# Altium PCB RHD2132_64CH.PcbDoc
Units mil, origin at the board's own origin, x right, y up, seen from the top; angles counter-clockwise.
Board outline 1050 x 1350 mil, 6 copper layers (Top Layer, Ground Plane 1, Third Layer, Fourth Layer, Ground Plane 2, Bottom Layer), stack 58.425 mil thick; 14 components, 79 nets, 236 pads, 256 vias.
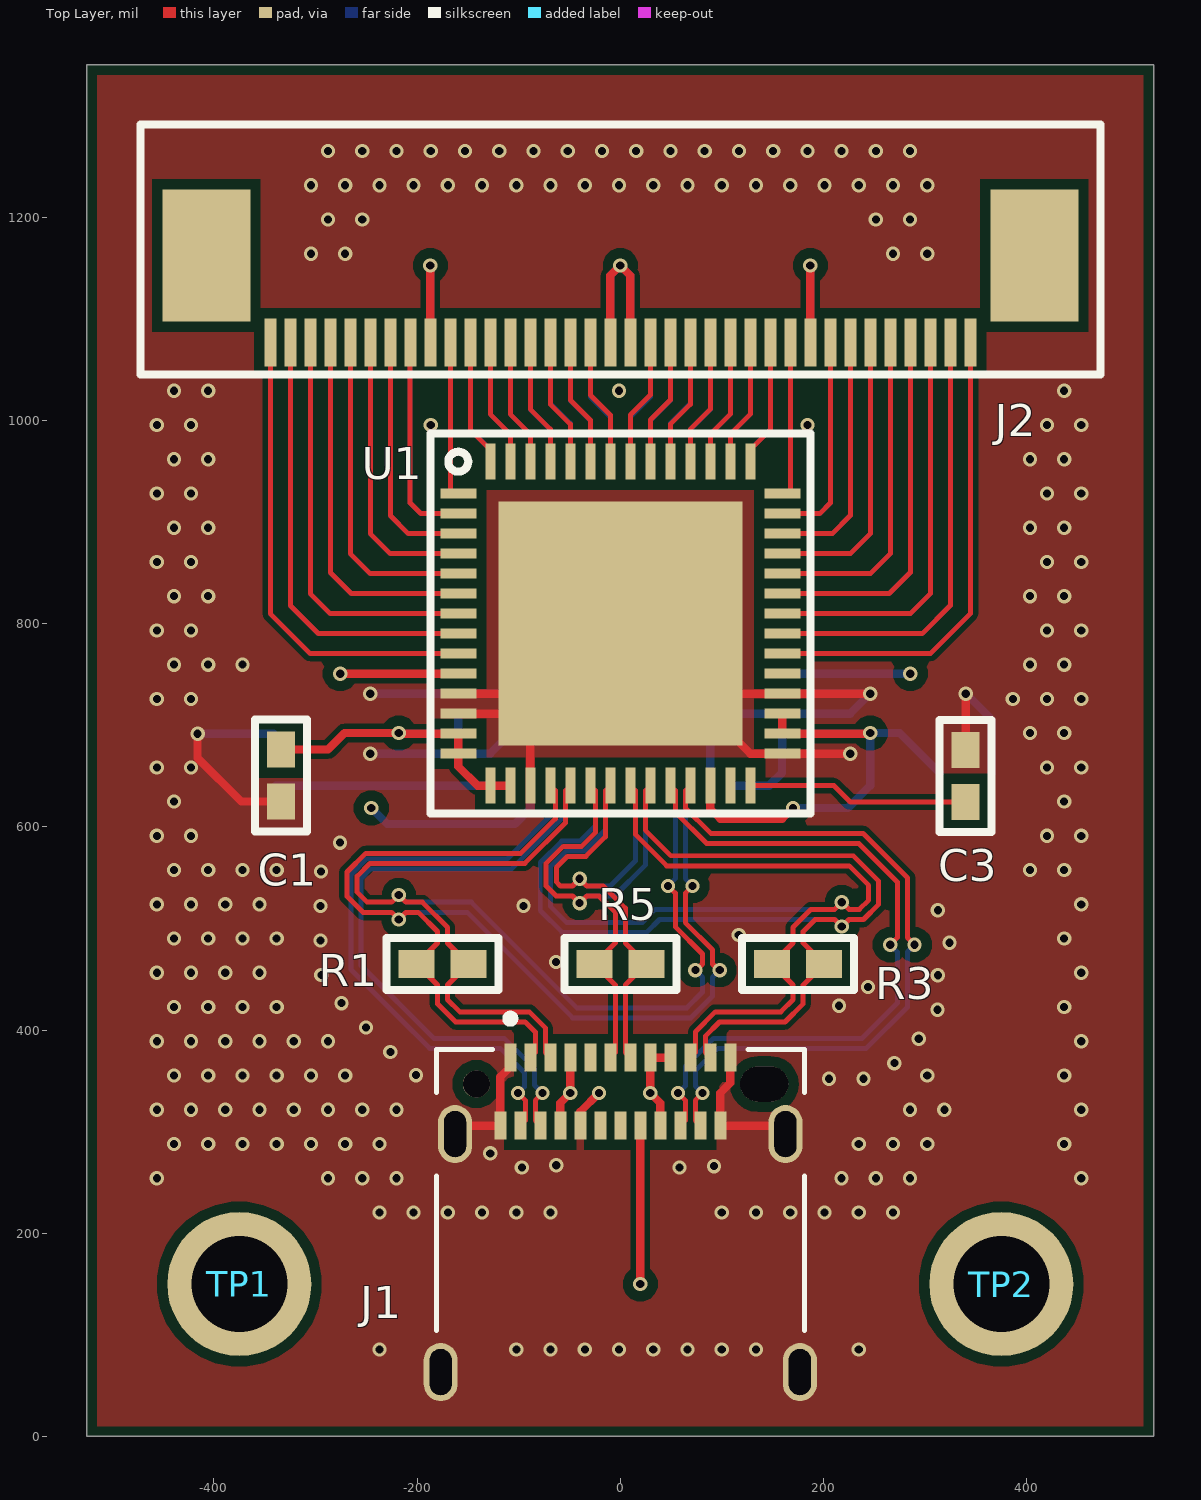
[diagram p0: Top Layer view]
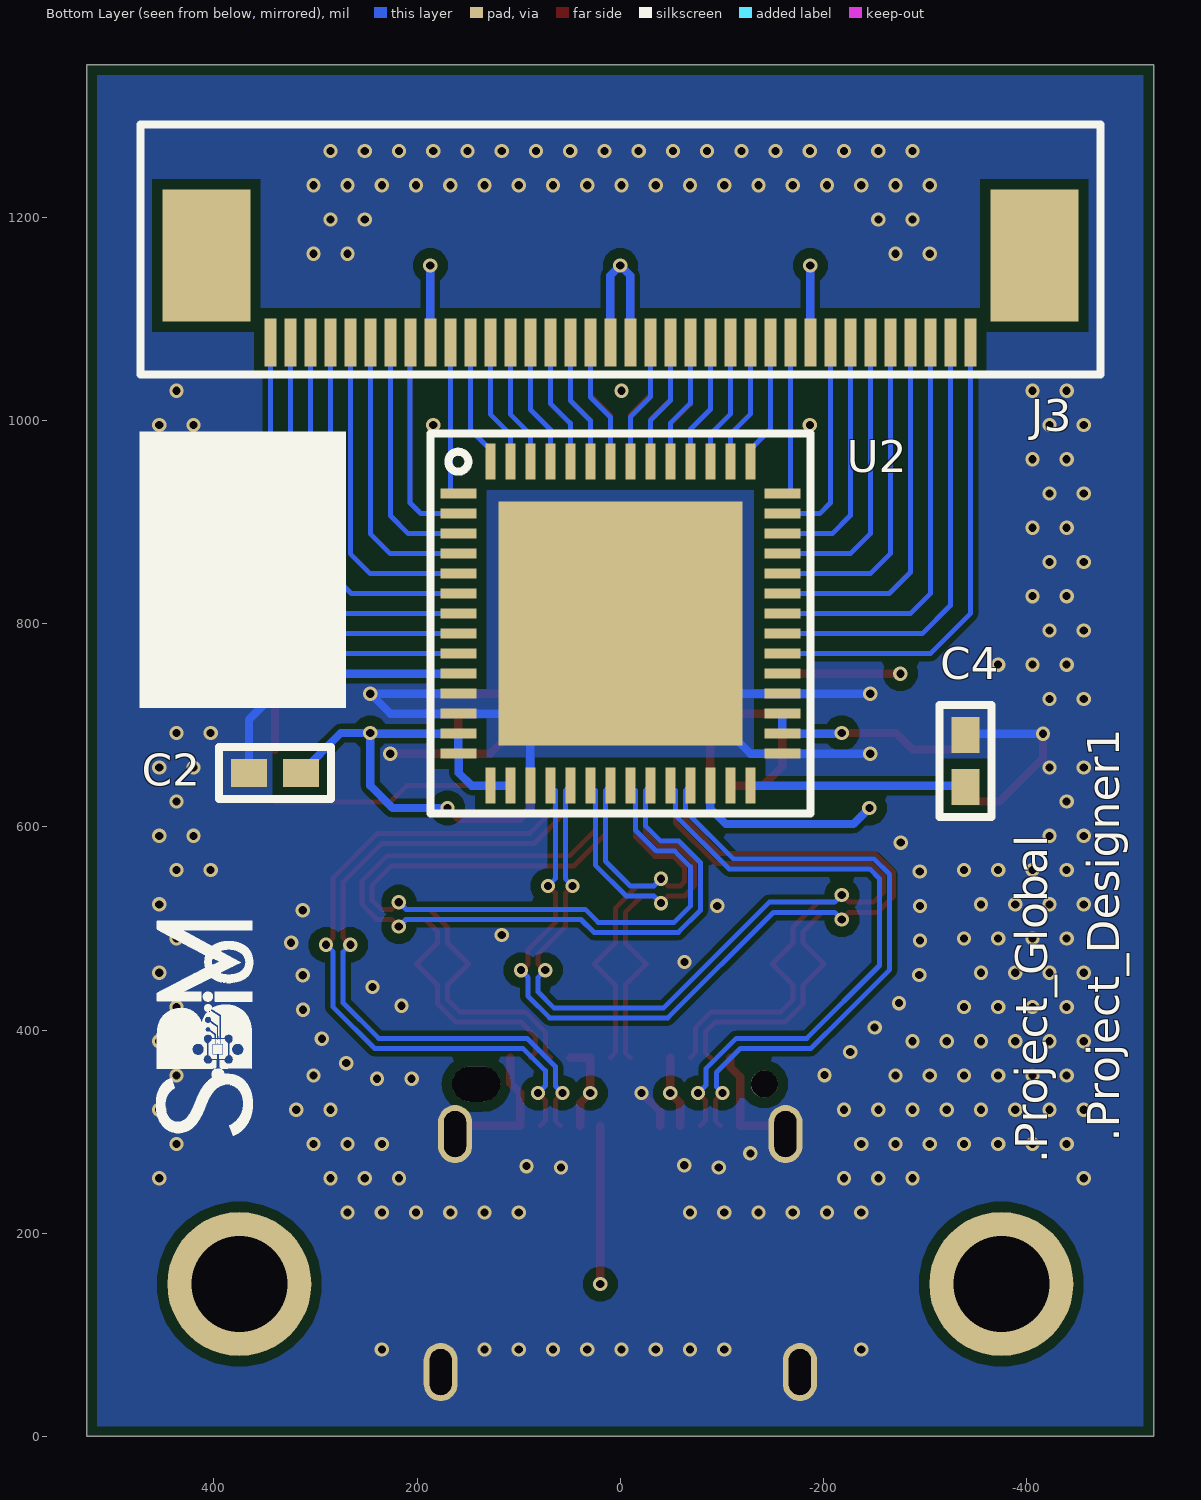
[diagram p1: Bottom Layer view, seen from below]
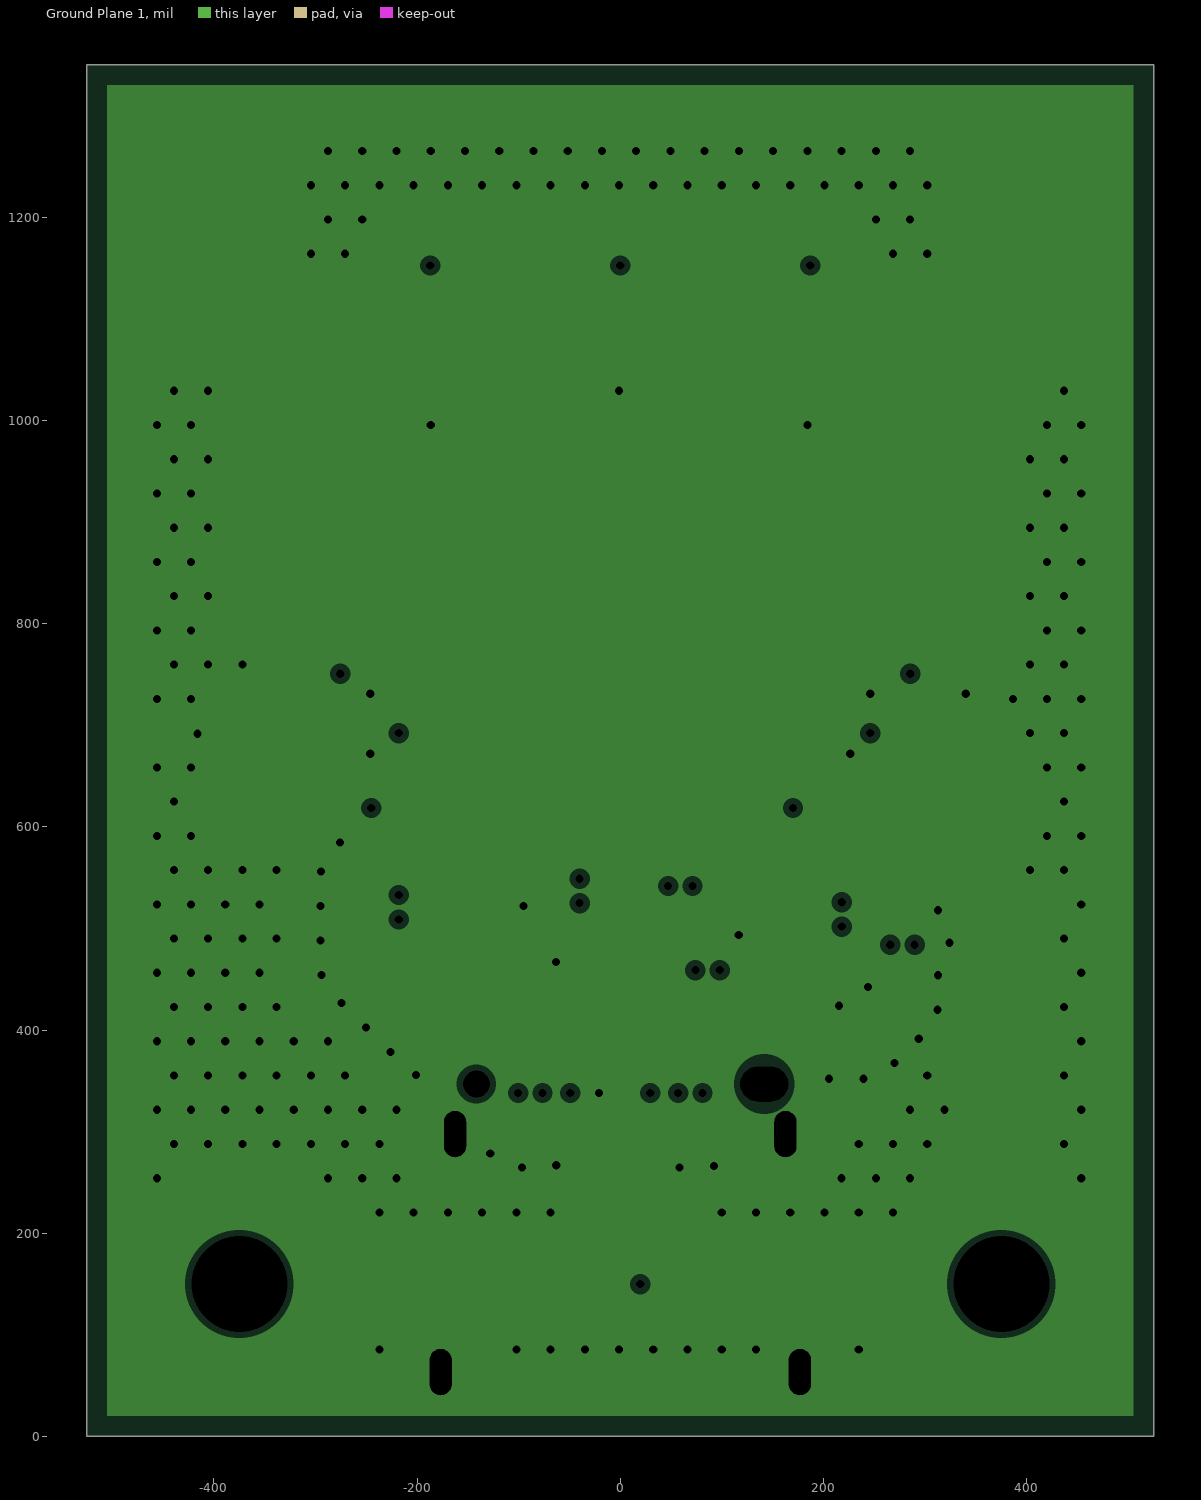
[diagram p2: Ground Plane 1, clearances drawn from the general rule]
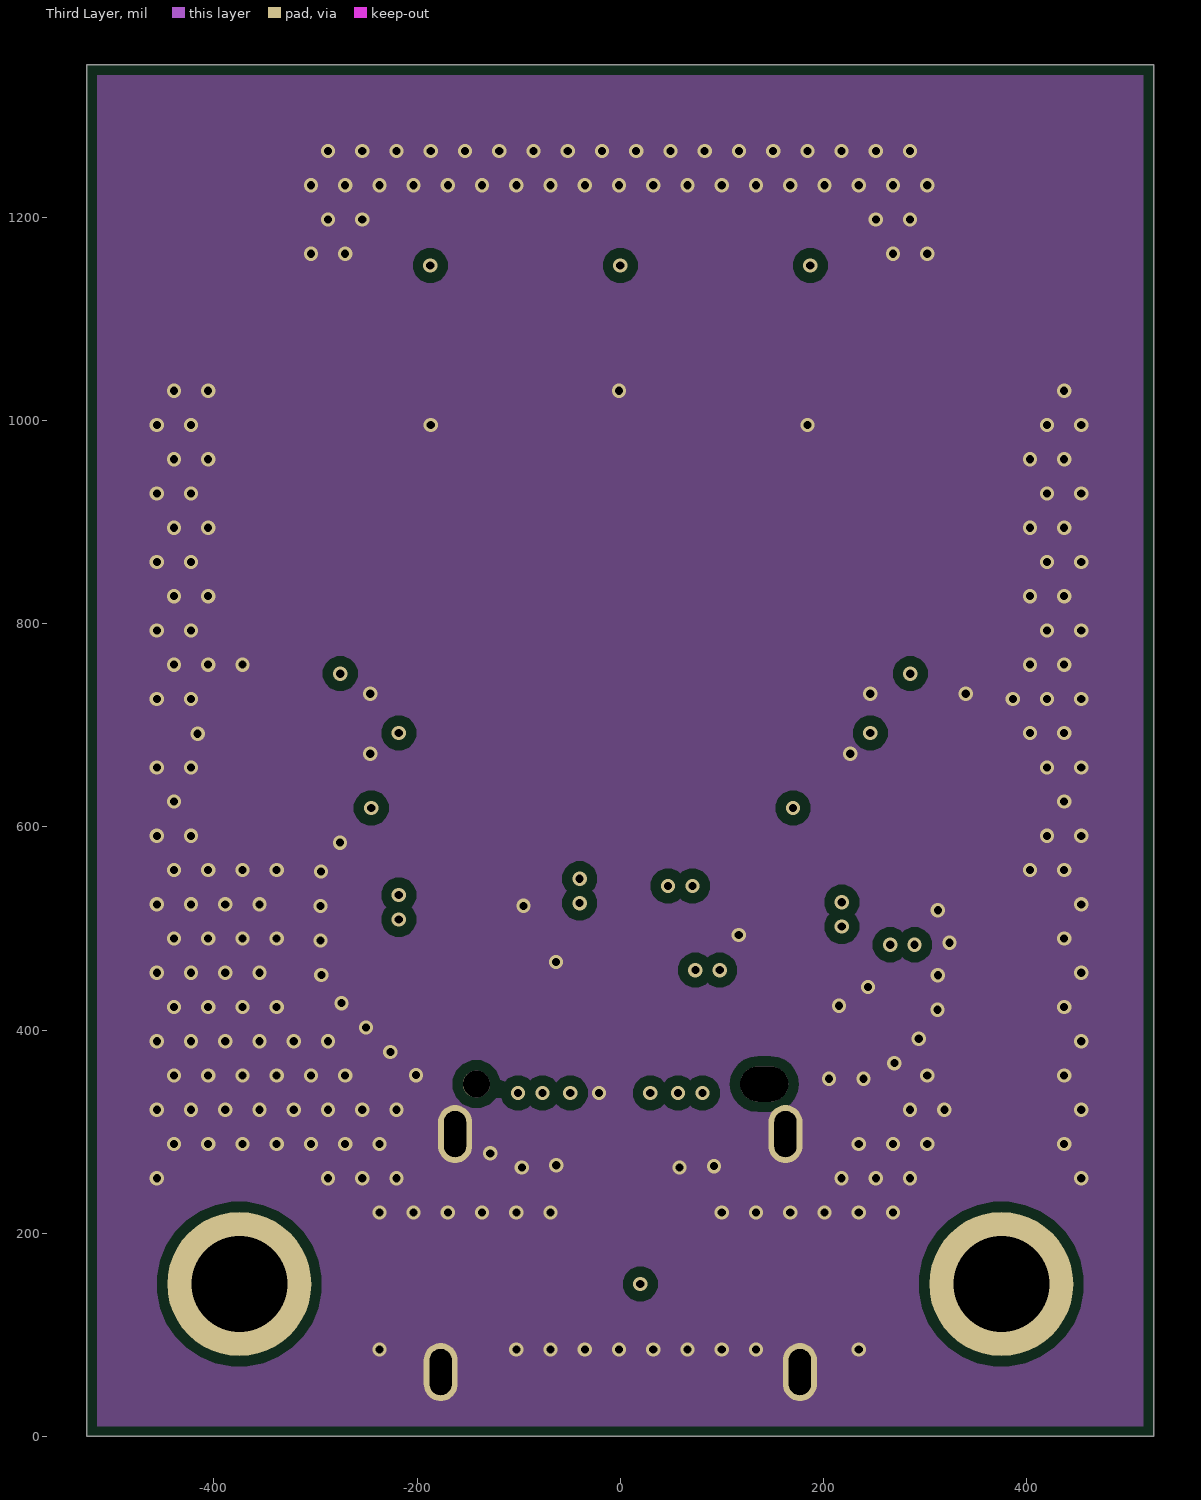
[diagram p3: Third Layer]
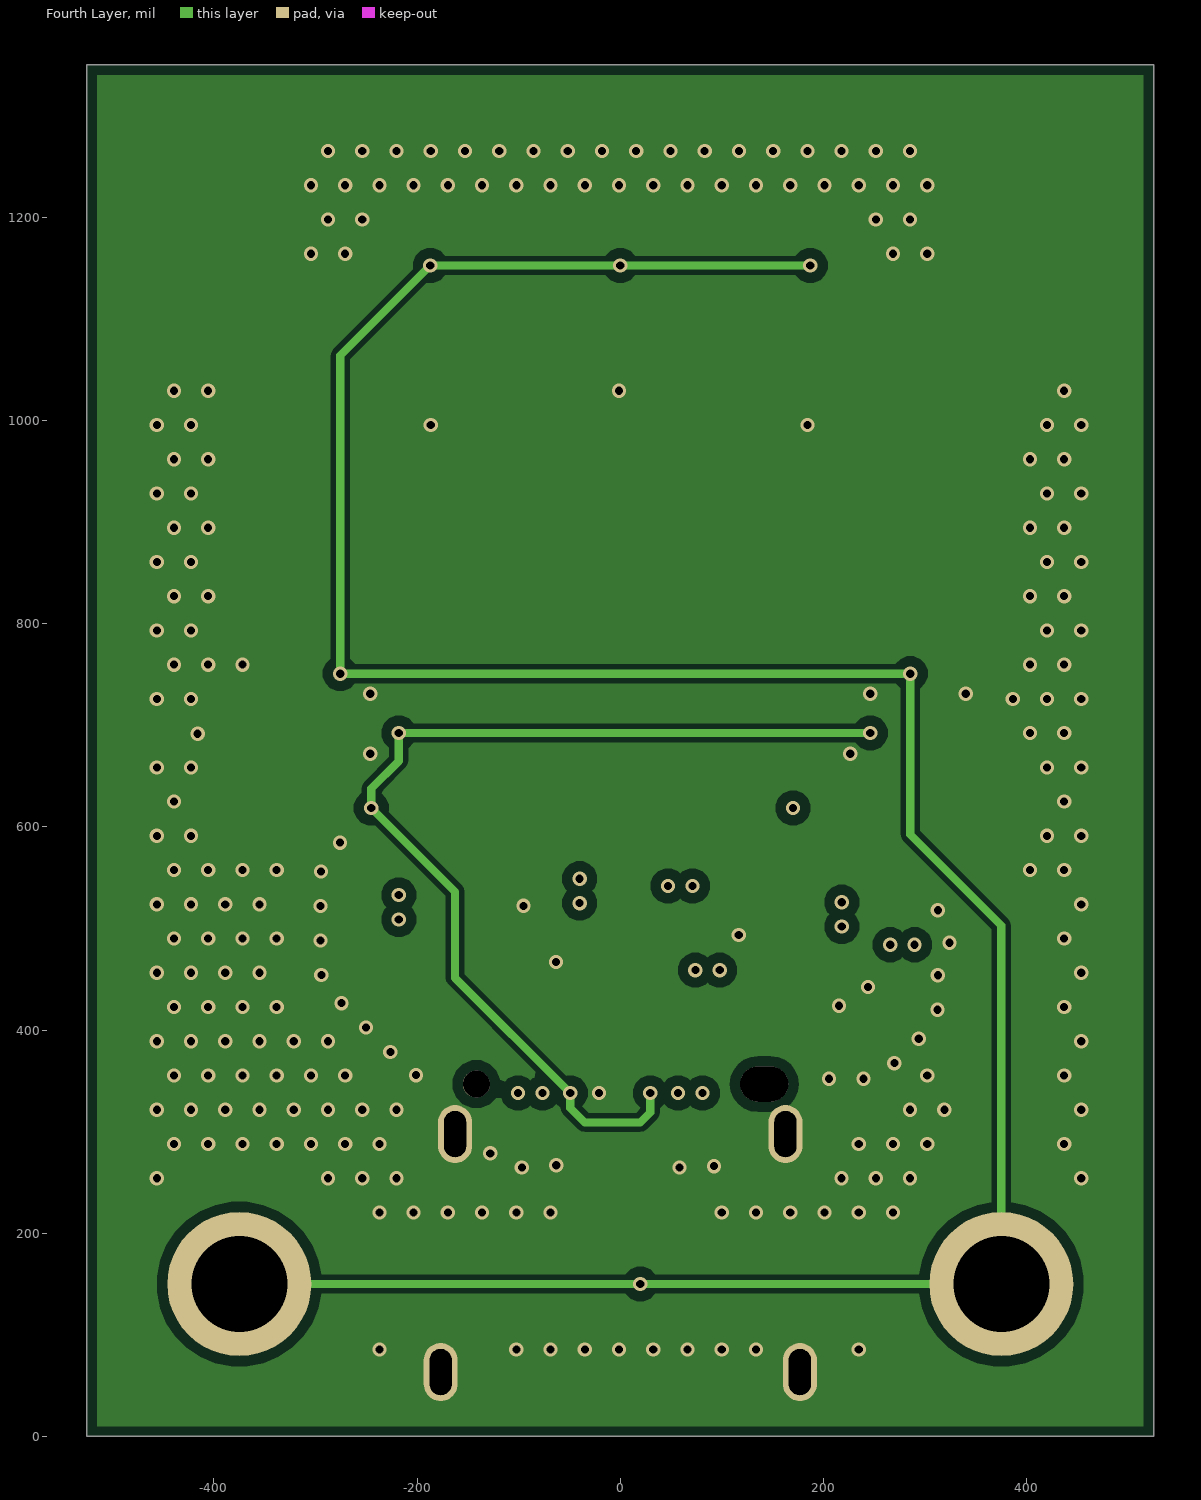
[diagram p4: Fourth Layer]
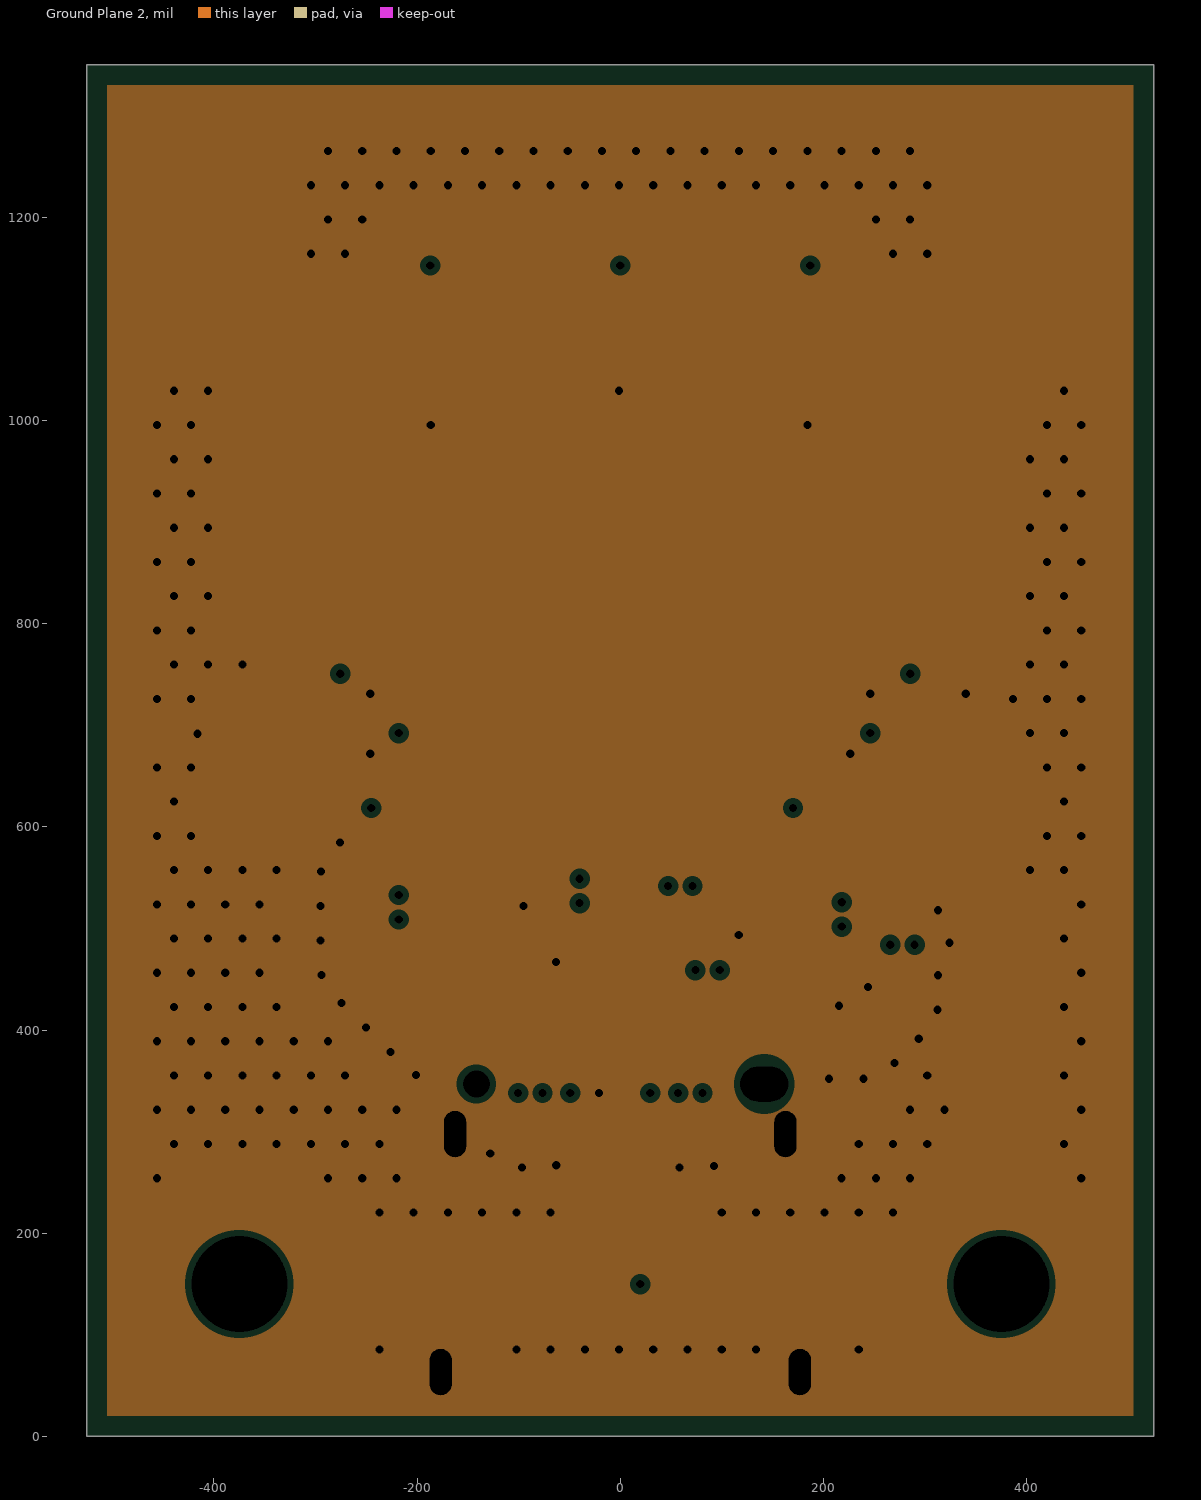
[diagram p5: Ground Plane 2, clearances drawn from the general rule]

## Layer stack, top to bottom
Top Solder: solder mask 0.3937, Solder Resist, Dk 3.5
Top Layer: signal copper 1.378
Dielectric 4: prepreg 4.7047, 2116 RC58%, Dk 4.45
Ground Plane 1: plane copper 1.378, net GND
Dielectric 2: core 16.9291, Core, Dk 4.6
Third Layer: signal copper 1.378
Dielectric 1: prepreg 6.8898, 7628 RC46%, Dk 4.74
Fourth Layer: signal copper 1.378
Dielectric 3: core 16.9291, Core, Dk 4.6
Ground Plane 2: plane copper 1.378, net GND
Dielectric 5: prepreg 4.7047, 2116 RC58%, Dk 4.45
Bottom Layer: signal copper 1.378
Bottom Solder: solder mask 0.3937, Solder Resist, Dk 3.5

## Board outline
-525,0 -525,1350 525,1350 525,0

## Design rules (kind name [scope] priority, off if disabled: settings)
AcuteAngle [All] p1: minimum=4.50000000000000E+0001 checktracksonly=FALSE
BoardOutlineClearance [All] p1: gap=10 ignorepadtopadclearanceinfootprint=FALSE
Clearance [All] p1: gap=10 ignorepadtopadclearanceinfootprint=TRUE except(5: Arc-Arc Arc-Track Arc-SMDPad Arc-THPad Arc-Via Arc-Fill Arc-Poly Arc-Region Arc-Text Arc-Hole Track-Track Track-SMDPad Track-THPad Track-Via Track-Fill Track-Poly Track-Region Track-Text Track-Hole SMDPad-Via)
ComponentClearance [All] p1: gap=4 collisioncheckmode=3 verticalgap=4 showdistances=FALSE
DiffPairsRouting [All] p1: maxlimit=8 minlimit=5 mostfreqgap=8 toplayer_maxgap=5 toplayer_prefgap=5 toplayer_minwidth=4.9 toplayer_maxwidth=4.9 toplayer_prefwidth=4.9 midlayer1_minwidth=15 midlayer1_maxwidth=15 midlayer1_prefwidth=15 midlayer2_mingap=8 midlayer2_minwidth=4 midlayer2_maxwidth=4 midlayer2_prefwidth=4 bottomlayer_maxgap=5 bottomlayer_prefgap=5 bottomlayer_minwidth=4.9 bottomlayer_maxwidth=4.9 bottomlayer_prefwidth=4.9 maxuncoupledlength=200
HoleSize [All] p1: absolutevalues=TRUE maxlimit=1000 minlimit=6 maxpercent=80.000 minpercent=20.000
HoleToHoleClearance [All] p1: gap=8 allowstackedmicrovias=FALSE
MatchedLengths [All] p1: tolerance=50 checknetsindiffpair=TRUE checkdiffpairvsdiffpair=FALSE checkxsignals=FALSE checkothers=FALSE
MinimumAnnularRing [All] p1: minimumring=3
MinimumSolderMaskSliver [All] p1: minsoldermaskwidth=3.94
PlaneClearance [All] p1: clearance=6
PlaneConnect [All] p1: planeconnectstyle=Direct reliefexpansion=20 reliefentries=4 reliefconductorwidth=10 reliefairgap=10
PolygonConnect [All] p1: connectstyle=Direct reliefconductorwidth=8 reliefentries=4 polygonreliefangle="90 Angle" airgapwidth=4
RoutingLayers [All] p1: top layer_v5=TRUE mid layer 1_v5=FALSE mid layer 2_v5=TRUE bottom layer_v5=TRUE
RoutingVias [All] p1: holewidth=8 width=14 viastyle="Through Hole" minholewidth=6 minwidth=14 maxholewidth=8 maxwidth=14
SilkToSilkClearance [All] p1: silktosilkclearance=4
SilkToSolderMaskClearance [IsPad] p1: minsilkscreentomaskgap=2 clearancetoexposedcopper=FALSE
SolderMaskExpansion SolderMaskExpansion_Vias [IsVia] p1: expansion=-10 istentingtop=TRUE
SolderMaskExpansion [All] p2: expansion=2 istentingtop=FALSE
SupplyNets "Schematic Supply Nets_2" [InNet('VDD_3V3')] p1: voltage=0.000
SupplyNets "Schematic Supply Nets_1" [InNet('GND')] p2: voltage=0.000
UnRoutedNet [All] p1: checkbadconnections=TRUE
Width Width_Power [InNetClass('Power')] p1: maxlimit=20 minlimit=6 preferedwidth=8
Width [All] p2: maxlimit=15 minlimit=5 preferedwidth=5 midlayer1_maxwidth=10 minimp=50.000000 maximp=50.000000 favimp=50.000000
19 further rules are at their usual default settings.

## Classes and differential pairs
differential pair SCLK: +SCLK_P -SCLK_N
differential pair MOSI: +MOSI_P -MOSI_N
differential pair MISO2: +MISO2_P -MISO2_N
differential pair MISO1: +MISO1_P -MISO1_N
differential pair C\S\: +C\S\_P -C\S\_N

## Components (designator, comment, footprint, x,y, rotation, side; value= is the part's Value field where it differs from the comment)
C1 "100n" 0402_CAPACITOR -334,650.59 r90 top
C2 "100n" 0402_CAPACITOR 340,653 r180 bottom
C3 "10n" 0402_CAPACITOR 340,650 r270 top
C4 "10n" 0402_CAPACITOR -340,665 r270 bottom
J1 "217183-0001" CON_USB_C_SMD 0,175 r0 top locked
J2 "3-2492104-6" CON_ZIF_RA_36POS 0,1076.93 r180 top locked
J3 "3-2492104-6" CON_ZIF_RA_36POS 0,1076.93 r0 bottom locked
R1 "100R" 0402_Resistor -175,465 r0 top
R3 "100R" 0402_Resistor 175,465 r0 top
R5 "100R" 0402_Resistor 0,465 r0 top
TP1 "TP_Small" TP_Small_M2 -375,150 r0 top
TP2 "TP_Small" TP_Small_M2 375,150 r0 top
U1 "RHD2132" QFN-56 0,800 r0 top locked
U2 "RHD2132" QFN-56 0,800 r180 bottom locked

## Footprints (in the part's own frame and the unit in brackets; to place one, negate y for a bottom-side part, rotate by r counter-clockwise, add the part's x,y. Pads: shape width x height; smd on the part's side, far side on the other; paste and mask are expansions set on the pad)
0402_CAPACITOR [mm]
  rect 0.9x0.7 smd: 1(-0.65,0) 2(0.65,0)
  silkscreen extent -1.4,-0.65 1.4,0.65
0402_Resistor [mm]
  rect 0.9x0.7 smd: 1(-0.65,0) 2(0.65,0)
  silkscreen extent -1.4,-0.65 1.4,0.65
CON_USB_C_SMD [mm] "12401610E4"
  oval 0.85x1.45 hole 0.55 slot 1.15 at 90 deg mask+0.05: 1(-4.49,-2.835) 2(4.49,-2.835) 3(-4.13,3.115) 4(4.13,3.115)
  rect 0.3x0.7 smd paste+0 mask+0.05: A1(-2.75,5.025) A2(-2.25,5.025) A3(-1.75,5.025) A4(-1.25,5.025) A5(-0.75,5.025) A6(-0.25,5.025) A7(0.25,5.025) A8(0.75,5.025) A9(1.25,5.025) A10(1.75,5.025) A11(2.25,5.025) A12(2.75,5.025) B1(2.5,3.325) B2(2,3.325) B3(1.5,3.325) B4(1,3.325) B5(0.5,3.325) B6(0,3.325) B7(-0.5,3.325) B8(-1,3.325) B9(-1.5,3.325) B10(-2,3.325) B11(-2.5,3.325) B12(-3,3.325)
  round 0.675 hole 0.675 unplated mask+0: ""(-3.6,4.365)
  oval 1.2x0.875 hole 0.875 slot 1.2 at 0 deg unplated mask+0: ""(3.6,4.366)
  silkscreen extent -4.6,-1.79 4.6,6.1, body extent -4.63,-5.25 4.57,5.25, height 3.44
CON_ZIF_RA_36POS [mm] "3-2492104-6 / 36 Position FPC Connector Contacts, Bottom 0.020\" (0.50mm) Surface Mount, Right Angle"
  rect 0.3x1.2 smd mask+0.025: 1(-8.75,0) 2(-8.25,0) 3(-7.75,0) 4(-7.25,0) 5(-6.75,0) 6(-6.25,0) 7(-5.75,0) 8(-5.25,0) 9(-4.75,0) 10(-4.25,0) 11(-3.75,0) 12(-3.25,0) 13(-2.75,0) 14(-2.25,0) 15(-1.75,0) 16(-1.25,0) 17(-0.75,0) 18(-0.25,0) 19(0.25,0) 20(0.75,0) 21(1.25,0) 22(1.75,0) 23(2.25,0) 24(2.75,0) 25(3.25,0) 26(3.75,0) 27(4.25,0) 28(4.75,0) 29(5.25,0) 30(5.75,0) 31(6.25,0) 32(6.75,0) 33(7.25,0) 34(7.75,0) 35(8.25,0) 36(8.75,0)
  rect 2.2x3.3 smd mask+0.025: M1(-10.35,-2.17) M2(10.35,-2.17)
  silkscreen extent -12,-5.45 12,0.8, body extent -11.8,-5.25 11.8,0.5, height 2
QFN-56 [mm] "56 Pin QFN Package"
  rect 0.9x0.25 smd mask+0.051: 1(-4.05,3.25) 2(-4.05,2.75) 3(-4.05,2.25) 4(-4.05,1.75) 5(-4.05,1.25) 6(-4.05,0.75) 7(-4.05,0.25) 8(-4.05,-0.25) 9(-4.05,-0.75) 10(-4.05,-1.25) 11(-4.05,-1.75) 12(-4.05,-2.25) 13(-4.05,-2.75) 14(-4.05,-3.25) 29(4.05,-3.25) 30(4.05,-2.75) 31(4.05,-2.25) 32(4.05,-1.75) 33(4.05,-1.25) 34(4.05,-0.75) 35(4.05,-0.25) 36(4.05,0.25) 37(4.05,0.75) 38(4.05,1.25) 39(4.05,1.75) 40(4.05,2.25) 41(4.05,2.75) 42(4.05,3.25)
  rect 0.25x0.9 smd mask+0.051: 15(-3.25,-4.05) 16(-2.75,-4.05) 17(-2.25,-4.05) 18(-1.75,-4.05) 19(-1.25,-4.05) 20(-0.75,-4.05) 21(-0.25,-4.05) 22(0.25,-4.05) 23(0.75,-4.05) 24(1.25,-4.05) 25(1.75,-4.05) 26(2.25,-4.05) 27(2.75,-4.05) 28(3.25,-4.05) 43(3.25,4.05) 44(2.75,4.05) 45(2.25,4.05) 46(1.75,4.05) 47(1.25,4.05) 48(0.75,4.05) 49(0.25,4.05) 50(-0.25,4.05) 51(-0.75,4.05) 52(-1.25,4.05) 53(-1.75,4.05) 54(-2.25,4.05) 55(-2.75,4.05) 56(-3.25,4.05)
  rect 6.1x6.1 smd mask+0.051: 57(0,0)
  silkscreen extent -4.75,-4.75 4.75,4.75, body extent -4,-4 4,4, height 0.85
TP_Small_M2 [mm]
  round 3.6 hole 2.4: 1(0,0)

## Part data
C1 C2 C3 C4: library part Capacitor, "Capacitor"
J1: library part CON_USBC_TH_SMT, "USB-C (USB TYPE-C) USB 3.2 Gen 1 (USB 3.1 Gen 1, Superspeed (USB 3.0)) Receptacle Connector 24 Position Through Hole, Right Angle"
J2 J3: library part CON_ZIF_RA_36POS, "36 Position FPC Connector Contacts, Bottom 0.020\" (0.50mm) Surface Mount, Right Angle", GRAMS Lib Spec=2.7
R1 R3 R5: library part Resistor, "Resistor", GRAMS Lib Spec=2.7
TP1 TP2: "Through Hole Test Point - M2"
U1 U2: library part IC_RHD2132, "INTAN RHD2132 - 56-QFN", GRAMS Lib Spec=2.7

## Via types
v1: diameter 14, hole 8, Top Layer to Bottom Layer, tented both sides, 256 vias

## Nets (pads, with @x,y where several pads share a name; then routed paths per layer and width w, separated by ;. In a path a pad name is that pad's centre, name@x,y a point inside that pad or via, vN(x,y) a via of type N, cw(c..) or ccw(c..) an arc to the next point about the centre after c; other vN are vias at no path point)
C\S\_N: J1.A2 R1.1 U1.18 U2.18 | length 1213.8
  Top Layer w4.9: J1.A2 -83.69,377.73 -83.69,398.1 -93.59,408 -162.05,408 -179.95,425.9 -179.95,444.36 R1.1 -179.95,485.64 -179.95,497 -198.9,515.95 -210.95,515.95 v1(-218,508.9) -225.05,515.95 -253.22,515.95 -268.96,531.69 -268.96,555.55 -250.51,574 -98,574 -64.01,608 -64.01,635.66 U1.18 ; v1(71.06,541.9) 64.01,534.85 64.01,505.8 90.8,479.01 90.8,465 96.8,459 v1(97.85,459)
  Bottom Layer w4.9: v1(-218,508.9) -210.95,515.95 -150.76,515.95 -46.87,412.07 69.53,412.07 90.8,433.33 90.8,451.95 v1(97.85,459) ; U2.18 64.01,635.66 64.01,548.95 v1(71.06,541.9)
C\S\_P: J1.A3 R1.2 U1.19 U2.19 | length 1197.4
  Top Layer w4.9: J1.A3 -73.79,377.73 -73.79,402.2 -89.49,417.9 -157.95,417.9 -170.05,430 -170.05,444.36 R1.2 -170.05,485.64 -170.05,501.1 -194.8,525.85 -210.95,525.85 v1(-218,532.9) -225.05,525.85 -249.12,525.85 -259.06,535.79 -259.06,551.44 -246.41,564.1 -93.9,564.1 -54.11,603.9 -54.11,635.66 U1.19 ; v1(47.06,541.9) 54.11,534.85 54.11,501.7 80.9,474.91 80.9,465 74.9,459 v1(73.85,459)
  Bottom Layer w4.9: v1(-218,532.9) -210.95,525.85 -146.65,525.85 -42.77,421.97 65.43,421.97 80.9,437.43 80.9,451.95 v1(73.85,459) ; v1(47.06,541.9) 54.11,548.95 54.11,635.66 U2.19
GND: C1.1 C2.1 C3.1 C4.1 J1.1 J1.2 J1.3 J1.4 J1.A1 J1.A12 J1.B1 J1.B8 J1.B12 U1.11 U1.12 U1.17 U1.29 U1.32 U1.57 U2.11 U2.12 U2.17 U2.29 U2.32 U2.57 | length 2032.2
  Top Layer w8: v1(-416,691.73) -416,667.95 -373.05,625 C1.1 ; J1.3 -154.33,305.91 J1.B12 -118.11,354.02 -108.27,363.87 J1.A1 ; U1.12 -88.58,711.42 U1.17 ; U1.11 -68.9,731.1 U1.57 ; J1.B8 -39.37,319.63 v1(-21,338) ; J1.A12 108.27,347.84 98.43,338 J1.B1 154.33,305.91 J1.4 ; v1(226.38,672.05) U1.29 127.95,672.05 68.9,731.1 U1.32 v1(246.06,731.1) ; C3.1 v1(340,731.1)
  Bottom Layer w8: v1(-416,691.73) -341.14,691.73 C4.1 ; v1(-246.06,672.05) U2.29 -127.95,672.05 -68.9,731.1 U2.32 v1(-246.06,731.1) ; U2.17 88.58,711.42 U2.12 226.38,711.42 v1(246.06,731.1) U2.11 ; v1(340,731.1) 365.59,705.51 C2.1
  other v1: -237.12,85.68 -102.32,85.68 -68.61,85.68 -34.91,85.68 -1.21,85.68 32.49,85.68 66.19,85.68 99.89,85.68 133.59,85.68 234.69,85.68 -237.12,220.48 -203.42,220.48 -169.72,220.48 -136.02,220.48 -102.32,220.48 -68.61,220.48 99.89,220.48 133.59,220.48 167.29,220.48 200.99,220.48 234.69,220.48 268.39,220.48 -456.17,254.18 -287.67,254.18 -253.97,254.18 -220.27,254.18 217.84,254.18 251.54,254.18 285.24,254.18 453.75,254.18 -96.93,264.89 58.34,264.89 92.32,266.08 -62.99,266.98 -128,278.71 -439.32,287.88 -405.62,287.88 -371.92,287.88 -338.22,287.88 -304.52,287.88 -270.82,287.88 -237.12,287.88 234.69,287.88 268.39,287.88 302.09,287.88 436.9,287.88 -456.17,321.58 -422.47,321.58 -388.77,321.58 -355.07,321.58 -321.37,321.58 -287.67,321.58 -253.97,321.58 -220.27,321.58 285.24,321.58 318.94,321.58 453.75,321.58 205.36,352.12 239.36,352.12 -439.32,355.28 -405.62,355.28 -371.92,355.28 -338.22,355.28 -304.52,355.28 -270.82,355.28 302.09,355.28 436.9,355.28 -201.09,355.63 269.71,367.44 -226.33,378.41 -456.17,388.98 -422.47,388.98 -388.77,388.98 -355.07,388.98 -321.37,388.98 -287.67,388.98 453.75,388.98 293.75,391.49 -250.37,402.46 312.3,419.98 -439.32,422.68 -405.62,422.68 -371.92,422.68 -338.22,422.68 436.9,422.68 215.38,423.99 -274.41,426.5 243.91,442.48 -294.25,454.11 312.53,453.98 -456.17,456.39 -422.47,456.39 -388.77,456.39 -355.07,456.39 453.75,456.39 -63.32,467.1 323.97,486 -294.95,488.1 -439.32,490.09 -405.62,490.09 -371.92,490.09 -338.22,490.09 436.9,490.09 116.64,493.58 312.53,518.02 -294.95,522.1 -95.4,522.31 -456.17,523.79 -422.47,523.79 -388.77,523.79 -355.07,523.79 453.75,523.79 -294.72,556.1 -439.32,557.49 -405.62,557.49 -371.92,557.49 -338.22,557.49 403.2,557.49 436.9,557.49 -276,584.49 -456.17,591.19 -422.47,591.19 420.05,591.19 453.75,591.19 -439.32,624.89 436.9,624.89 -456.17,658.59 -422.47,658.59 420.05,658.59 453.75,658.59 403.2,692.29 436.9,692.29 -456.17,725.99 -422.47,725.99 386.35,725.99 420.05,725.99 453.75,725.99 -439.32,759.69 -405.62,759.69 -371.92,759.69 403.2,759.69 436.9,759.69 -456.17,793.39 -422.47,793.39 420.05,793.39 453.75,793.39 -439.32,827.09 -405.62,827.09 403.2,827.09 436.9,827.09 -456.17,860.8 -422.47,860.8 420.05,860.8 453.75,860.8 -439.32,894.5 -405.62,894.5 403.2,894.5 436.9,894.5 -456.17,928.2 -422.47,928.2 420.05,928.2 453.75,928.2 -439.32,961.9 -405.62,961.9 403.2,961.9 436.9,961.9 -456.17,995.6 -422.47,995.6 -186.57,995.6 184.14,995.6 420.05,995.6 453.75,995.6 -439.32,1029.3 -405.62,1029.3 -1.21,1029.3 436.9,1029.3 -304.52,1164.1 -270.82,1164.1 268.39,1164.1 302.09,1164.1 -287.67,1197.8 -253.97,1197.8 251.54,1197.8 285.24,1197.8 -304.52,1231.5 -270.82,1231.5 -237.12,1231.5 -203.42,1231.5 -169.72,1231.5 -136.02,1231.5 -102.32,1231.5 -68.61,1231.5 -34.91,1231.5 -1.21,1231.5 32.49,1231.5 66.19,1231.5 99.89,1231.5 133.59,1231.5 167.29,1231.5 200.99,1231.5 234.69,1231.5 268.39,1231.5 302.09,1231.5 -287.67,1265.2 -253.97,1265.2 -220.27,1265.2 -186.57,1265.2 -152.87,1265.2 -119.17,1265.2 -85.46,1265.2 -51.76,1265.2 -18.06,1265.2 15.64,1265.2 49.34,1265.2 83.04,1265.2 116.74,1265.2 150.44,1265.2 184.14,1265.2 217.84,1265.2 251.54,1265.2 285.24,1265.2
INPUT0: J2.36 U1.9 | length 468.4
  Top Layer w5: J2.36 -344.49,809.84 -305.12,770.47 U1.9
INPUT1: J2.35 U1.8 | length 435.9
  Top Layer w5: J2.35 -324.8,817.8 -297.16,790.16 U1.8
INPUT2: J2.34 U1.7 | length 401.2
  Top Layer w5: J2.34 -305.12,829.53 -285.43,809.84 U1.7
INPUT3: J2.33 U1.6 | length 361.1
  Top Layer w5: J2.33 -285.43,850.43 -264.53,829.53 U1.6
INPUT4: J2.32 U1.5 | length 322.5
  Top Layer w5: J2.32 -265.75,868.9 -246.06,849.21 U1.5
INPUT5: J2.31 U1.4 | length 283.1
  Top Layer w5: J2.31 -246.06,888.58 -226.38,868.9 U1.4
INPUT6: J2.30 U1.3 | length 244.9
  Top Layer w5: J2.30 -226.38,906.38 -208.58,888.58 U1.3
INPUT7: J2.29 U1.2 | length 210.1
  Top Layer w5: J2.29 -207,1076.62 -207,919 -196.27,908.27 U1.2
INPUT8: J2.27 U1.1 | length 156.9
  Top Layer w5: J2.27 -167.32,927.95 U1.1
INPUT9: J2.26 U1.56 | length 125.6
  Top Layer w5: J2.26 -147.64,990.82 -127.95,971.14 U1.56
INPUT10: J2.25 U1.55 | length 125.6
  Top Layer w5: J2.25 -127.95,1006.22 -108.27,986.54 U1.55
INPUT11: J2.24 U1.54 | length 125.6
  Top Layer w5: J2.24 -108.27,1006.22 -88.58,986.54 U1.54
INPUT12: J2.23 U1.53 | length 125.6
  Top Layer w5: J2.23 -88.58,1011.11 -68.9,991.43 U1.53
INPUT13: J2.22 U1.52 | length 125.6
  Top Layer w5: J2.22 -68.9,1016.01 -49.21,996.32 U1.52
INPUT14: J2.21 U1.51 | length 125.6
  Top Layer w5: J2.21 -49.21,1020.22 -29.53,1000.53 U1.51
INPUT15: J2.20 U1.50 | length 125.6
  Top Layer w5: J2.20 -29.53,1025.11 -9.84,1005.43 U1.50
INPUT16: J2.17 U1.49 | length 125.6
  Top Layer w5: U1.49 9.84,1005.43 29.53,1025.11 J2.17
INPUT17: J2.16 U1.48 | length 125.6
  Top Layer w5: U1.48 29.53,1000.53 49.21,1020.22 J2.16
INPUT18: J2.15 U1.47 | length 125.6
  Top Layer w5: U1.47 49.21,996.32 68.9,1016.01 J2.15
INPUT19: J2.14 U1.46 | length 125.6
  Top Layer w5: U1.46 68.9,991.43 88.58,1011.11 J2.14
INPUT20: J2.13 U1.45 | length 125.6
  Top Layer w5: U1.45 88.58,986.54 108.27,1006.22 J2.13
INPUT21: J2.12 U1.44 | length 125.6
  Top Layer w5: U1.44 108.27,986.54 127.95,1006.22 J2.12
INPUT22: J2.11 U1.43 | length 125.6
  Top Layer w5: U1.43 127.95,971.14 147.64,990.82 J2.11
INPUT23: J2.10 U1.42 | length 156.9
  Top Layer w5: U1.42 167.32,927.95 J2.10
INPUT24: J2.8 U1.41 | length 210.1
  Top Layer w5: U1.41 196.27,908.27 207,919 207,1076.62 J2.8
INPUT25: J2.7 U1.40 | length 244.9
  Top Layer w5: U1.40 208.58,888.58 226.38,906.38 J2.7
INPUT26: J2.6 U1.39 | length 283.1
  Top Layer w5: U1.39 226.38,868.9 246.06,888.58 J2.6
INPUT27: J2.5 U1.38 | length 322.5
  Top Layer w5: U1.38 246.06,849.21 265.75,868.9 J2.5
INPUT28: J2.4 U1.37 | length 361.1
  Top Layer w5: U1.37 264.53,829.53 285.43,850.43 J2.4
INPUT29: J2.3 U1.36 | length 401.2
  Top Layer w5: U1.36 285.43,809.84 305.12,829.53 J2.3
INPUT30: J2.2 U1.35 | length 435.9
  Top Layer w5: U1.35 297.16,790.16 324.8,817.8 J2.2
INPUT31: J2.1 U1.34 | length 468.4
  Top Layer w5: U1.34 305.12,770.47 344.49,809.84 J2.1
INPUT32: J3.36 U2.9 | length 468.4
  Bottom Layer w5: U2.9 305.12,770.47 344.49,809.84 J3.36
INPUT33: J3.35 U2.8 | length 435.9
  Bottom Layer w5: U2.8 297.16,790.16 324.8,817.8 J3.35
INPUT34: J3.34 U2.7 | length 401.2
  Bottom Layer w5: U2.7 285.43,809.84 305.12,829.53 J3.34
INPUT35: J3.33 U2.6 | length 361.1
  Bottom Layer w5: U2.6 264.53,829.53 285.43,850.43 J3.33
INPUT36: J3.32 U2.5 | length 322.5
  Bottom Layer w5: U2.5 246.06,849.21 265.75,868.9 J3.32
INPUT37: J3.31 U2.4 | length 283.1
  Bottom Layer w5: U2.4 226.38,868.9 246.06,888.58 J3.31
INPUT38: J3.30 U2.3 | length 244.9
  Bottom Layer w5: U2.3 208.58,888.58 226.38,906.38 J3.30
INPUT39: J3.29 U2.2 | length 210.1
  Bottom Layer w5: U2.2 196.27,908.27 207,919 207,1076.62 J3.29
INPUT40: J3.27 U2.1 | length 156.9
  Bottom Layer w5: U2.1 167.32,927.95 J3.27
INPUT41: J3.26 U2.56 | length 125.6
  Bottom Layer w5: U2.56 127.95,960.33 127.95,971.44 147.64,991.12 J3.26
INPUT42: J3.25 U2.55 | length 125.6
  Bottom Layer w5: U2.55 108.27,986.54 127.95,1006.22 J3.25
INPUT43: J3.24 U2.54 | length 125.6
  Bottom Layer w5: U2.54 88.58,986.54 108.27,1006.22 J3.24
INPUT44: J3.23 U2.53 | length 125.6
  Bottom Layer w5: U2.53 68.9,991.12 88.58,1010.81 J3.23
INPUT45: J3.22 U2.52 | length 125.6
  Bottom Layer w5: U2.52 49.21,997.27 68.9,1016.95 J3.22
INPUT46: J3.21 U2.51 | length 125.6
  Bottom Layer w5: U2.51 29.53,999.95 49.21,1019.63 J3.21
INPUT47: J3.20 U2.50 | length 125.6
  Bottom Layer w5: U2.50 9.84,1003.44 29.53,1023.12 J3.20
INPUT48: J3.17 U2.49 | length 125.6
  Bottom Layer w5: J3.17 -29.53,1023.12 -9.84,1003.44 U2.49
INPUT49: J3.16 U2.48 | length 125.6
  Bottom Layer w5: J3.16 -49.21,1019.63 -29.53,999.95 U2.48
INPUT50: J3.15 U2.47 | length 125.6
  Bottom Layer w5: J3.15 -68.9,1016.95 -49.21,997.27 U2.47
INPUT51: J3.14 U2.46 | length 125.6
  Bottom Layer w5: J3.14 -88.58,1010.81 -68.9,991.12 U2.46
INPUT52: J3.13 U2.45 | length 125.6
  Bottom Layer w5: J3.13 -108.27,1006.22 -88.58,986.54 U2.45
INPUT53: J3.12 U2.44 | length 125.6
  Bottom Layer w5: J3.12 -127.95,1006.22 -108.27,986.54 U2.44
INPUT54: J3.11 U2.43 | length 125.6
  Bottom Layer w5: J3.11 -147.64,991.12 -127.95,971.44 -127.95,960.33 U2.43
INPUT55: J3.10 U2.42 | length 164.7
  Bottom Layer w5: J3.10 U2.42@-167.32,927.95 ; U2.42@-167.32,927.95 U2.42 U2.42@-167.32,927.95
INPUT56: J3.8 U2.41 | length 209.6
  Bottom Layer w5: J3.8@-207,1076.62 -207,919 -196.27,908.27 U2.41
INPUT57: J3.7 U2.40 | length 244.9
  Bottom Layer w5: J3.7 -226.38,906.38 -208.58,888.58 U2.40
INPUT58: J3.6 U2.39 | length 283.1
  Bottom Layer w5: J3.6 -246.06,888.58 -226.38,868.9 U2.39
INPUT59: J3.5 U2.38 | length 322.5
  Bottom Layer w5: J3.5 -265.75,868.9 -246.06,849.21 U2.38
INPUT60: J3.4 U2.37 | length 361.1
  Bottom Layer w5: J3.4 -285.43,850.43 -264.53,829.53 U2.37
INPUT61: J3.3 U2.36 | length 401.2
  Bottom Layer w5: J3.3 -305.12,829.53 -285.43,809.84 U2.36
INPUT62: J3.2 U2.35 | length 435.9
  Bottom Layer w5: J3.2 -324.8,817.8 -297.16,790.16 U2.35
INPUT63: J3.1 U2.34 | length 468.4
  Bottom Layer w5: J3.1 -344.49,809.84 -305.12,770.47 U2.34
MISO1_N: J1.B3 U1.24 | length 700.8
  Top Layer w4.9: U1.24 54.11,635.66 54.11,614.55 84.93,583.72 234.81,583.72 272.75,545.79 272.75,491.05 v1(265.7,484) ; v1(56.9,338) 63.95,330.95 63.95,310.8 J1.B3
  Bottom Layer w4.9: v1(56.9,338) 63.95,345.05 63.95,364.1 91.75,391.9 237.9,391.9 272.75,426.75 272.75,476.95 v1(265.7,484)
MISO1_P: J1.B2 U1.25 | length 700.8
  Top Layer w4.9: U1.25 64.01,635.66 64.01,618.65 89.04,593.62 238.91,593.62 282.65,549.89 282.65,491.05 v1(289.7,484) ; J1.B2 73.85,310.8 73.85,330.95 v1(80.9,338)
  Bottom Layer w4.9: v1(80.9,338) 73.85,345.05 73.85,360 95.85,382 242,382 282.65,422.65 282.65,476.95 v1(289.7,484)
MISO2_N: J1.B10 U2.24 | length 620.6
  Top Layer w4.9: J1.B10 -83.63,310.8 -83.63,330.95 v1(-76.58,338)
  Bottom Layer w4.9: v1(-76.58,338) -84.59,346.01 -84.59,362.28 -114.2,391.9 -183.55,391.9 -255.16,463.52 -255.16,549.06 -245.48,558.74 -106.99,558.74 -54.11,611.62 -54.11,635.66 U2.24
MISO2_P: J1.B11 U2.25 | length 619.8
  Top Layer w4.9: v1(-100.58,338) -93.53,330.95 -93.53,310.8 J1.B11
  Bottom Layer w4.9: v1(-100.58,338) -94.49,344.09 -94.49,358.18 -118.3,382 -187.65,382 -219.28,413.63 -265.06,459.42 -265.06,553.16 -249.58,568.64 -111.09,568.64 -64.01,615.73 -64.01,635.66 U2.25
MOSI_N: J1.A10 R3.1 U1.22 U2.22 | length 1086.5
  Top Layer w4.9: U1.22 14.74,635.66 14.74,592.6 45.63,561.71 225.24,561.71 244.42,542.53 244.42,527.93 235.29,518.8 225.05,518.8 v1(218,525.85) 210.95,518.8 187.75,518.8 170.05,501.1 170.05,485.64 R3.1 170.05,444.36 170.05,430 157.95,417.9 93.59,417.9 73.79,398.1 73.79,377.73 J1.A10
  Bottom Layer w4.9: U2.22 -14.74,635.66 -14.74,597.01 -35.68,576.06 -53.62,576.06 -68.89,560.8 -68.89,521.89 -53.08,506.08 21.82,506.08 34.54,518.8 210.95,518.8 v1(218,525.85)
MOSI_P: J1.A11 R3.2 U1.23 U2.23 | length 1102.9
  Top Layer w4.9: U1.23 24.64,635.66 24.64,596.7 49.73,571.61 229.34,571.61 254.32,546.63 254.32,523.83 239.39,508.9 225.05,508.9 v1(218,501.85) 210.95,508.9 191.85,508.9 179.95,497 179.95,485.64 R3.2 179.95,444.36 179.95,425.9 162.05,408 97.69,408 83.69,394 83.69,377.73 J1.A11
  Bottom Layer w4.9: U2.23 -24.63,635.66 -24.63,601.11 -39.78,585.96 -57.72,585.96 -78.79,564.9 -78.79,517.79 -57.18,496.18 25.92,496.18 38.64,508.9 210.95,508.9 v1(218,501.85)
NetC3_2: C3.2 U1.28 | length 218.7
  Top Layer w5: U1.28 210.24,640.55 226.38,624.41 C3.2
NetC4_2: C4.2 U2.28 | length 212.5
  Bottom Layer w8: C4.2 -338.86,640.55 U2.28
REF: J1.B5 J2.9 J2.18 J2.19 J2.28 J3.9 J3.18 J3.19 J3.28 TP1.1 TP2.1 U1.10 U2.10 | length 3781.4
  Top Layer w8: v1(-275.65,750.79) U1.10 ; J2.28 v1(-187.01,1152.52) ; J2.19 -9.84,1142.68 v1(0,1152.52) 9.84,1142.68 J2.18 ; J1.B5 19.69,152.13 v1@21.82,150 ; J2.9 v1(187.01,1152.52)
  Fourth Layer w8: TP1.1 v1(19.69,150) TP2.1 375,503 285.43,592.57 v1(285.43,750.79) v1(-275.65,750.79) -275.65,1063.88 v1(-187.01,1152.52) v1(0,1152.52) v1(187.01,1152.52)
  Bottom Layer w8: J3.9 v1(-187.01,1152.52) ; J3.18 -9.84,1142.68 v1(0,1152.52) 9.84,1142.68 J3.19 ; U2.10 v1(285.43,750.79) ; J3.28 v1(187.01,1152.52)
SCLK_N: J1.A6 R5.1 U1.20 U2.20 | length 538.5
  Top Layer w4.9: U1.20 -24.63,635.66 -24.63,594.26 -38,580.9 -56.1,580.9 -72.9,564.1 -72.9,541.74 -63.16,532 -47.05,532 v1(-40,524.95) -32.95,532 -21,532 -4.95,515.95 -4.95,485.64 R5.1 -4.95,444.36 -4.95,377.73 J1.A6
  Bottom Layer w4.9: v1(-40,524.95) -32.95,532 -5.74,532 24.64,562.38 24.64,635.66 U2.20
SCLK_P: J1.A7 R5.2 U1.21 U2.21 | length 522.1
  Top Layer w4.9: U1.21 -14.74,635.66 -14.74,590.16 -33.9,571 -52,571 -63,560 -63,545.85 -59.06,541.9 -47.05,541.9 v1(-40,548.95) -32.95,541.9 -16.9,541.9 -14,539 4.95,520.05 4.95,485.64 R5.2 4.95,444.36 4.95,377.73 J1.A7
  Bottom Layer w4.9: v1(-40,548.95) -32.95,541.9 -9.84,541.9 14.74,566.48 14.74,635.66 U2.21
VDD_3V3: C1.2 C2.2 J1.A4 J1.A8 J1.A9 J1.B4 J1.B9 U1.13 U1.14 U1.15 U1.16 U1.26 U1.30 U1.31 U2.13 U2.14 U2.15 U2.16 U2.26 U2.30 U2.31 | length 2360.6
  Top Layer w8: C1.2 -287.65,676.18 -271.51,692.31 v1(-218,692.31) -217.42,691.73 U1.13 U1.14 -159.45,659.43 -140.57,640.55 U1.15 U1.16 ; J1.B9 -59.06,328.16 v1(-49.21,338) J1.A4 ; J1.B4 39.37,328.16 v1(29.53,338) J1.A8 J1.A9 ; U1.26 88.58,617.84 98.43,608 159.4,608 v1(170.05,618.65) ; U1.31 U1.30 245.48,691.73 v1(246.06,692.31)
  Fourth Layer w8: v1(29.53,338) 29.53,318.84 19.69,309 -35,309 -49.21,323.21 v1(-49.21,338) -162.6,451.39 -162.6,536.12 v1(-245.13,618.65) -245.13,637.87 -218,665 v1(-218,692.31) v1(246.06,692.31)
  Bottom Layer w8: v1(-245.13,618.65) -229.38,602.9 -103.75,602.9 -88.58,618.07 U2.26 ; v1(-218,692.31) -217.42,691.73 U2.30 U2.31 ; U2.16 U2.15 146.55,640.55 159,653 159,671.6 U2.14 U2.13 245.48,691.73 v1(246.06,692.31) ; v1(170.05,618.65) 224.16,618.65 246.06,640.55 v1(246.06,692.31) ; C2.2 275.09,692.31 v1(246.06,692.31)
pads on no net: J1. J1.A5 J1.B6 J1.B7 J2.M1 J2.M2 J3.M1 J3.M2 U1.27 U1.33 U2.27 U2.33

## Polygon pours and split planes (outlines as drawn)
GND on Bottom Layer "GND_BOT" (solid, remove dead copper, pour order 3): -525,1350 -525,0 525,0 525,1350
GND on Third Layer "GND_3RD" (solid, remove dead copper, pour order 1): -525,1350 525,1350 525,0 -525,0
GND on Fourth Layer "GND_4TH" (solid, remove dead copper, pour order 2): 525,1350 -525,1350 -525,0 525,0
GND on Top Layer "GND_TOP" (solid, remove dead copper, pour order 0): -525,1350 525,1350 525,0 -525,0
GND on Ground Plane 2 (split plane): 504.9,20.1 -504.9,20.1 -504.9,1329.9 504.9,1329.9
GND on Ground Plane 1 (split plane): 504.9,20.1 -504.9,20.1 -504.9,1329.9 504.9,1329.9

## Silkscreen, mask and mechanical layers (free items; w line width, h text height)
Bottom Overlay:
  drawing of 10 lines, arcs and shapes, not listed
  text ".Project_Designer1" at -491,290 h31.5 r270
  text ".Project_Global" at -420,269 h31.5 r270
Board Outline:
  the board outline again, w10
Manufacturing Notes:
  lines w10: 699.39,-803.35 699.39,1450.95 ; 699.39,-648.23 3050.66,-648.23 ; 699.39,-499.05 3050.66,-499.05 ; 699.39,-498.23 3050.66,-498.23 ; 699.39,-349.05 3050.66,-349.05 ; 699.39,-49.05 3050.66,-49.05 ; 1249.39,-803.35 1249.39,1450.94 ; 1249.39,-499.05 1749.39,-499.05 ; 1249.39,-199.05 1749.39,-199.05 ; 1749.39,-803.35 1749.39,1450.94 ; 2000.66,-798.23 2500.66,-798.23 ; 2000.66,-498.23 2500.66,-498.23 ; 2149.39,-803.35 2149.39,1450.94 ; 2149.39,-199.05 2699.39,-199.05 ; 2699.39,-803.35 2699.39,1450.94 ; 2991.61,1450.95 3050.66,1450.95 ; 3049.39,-803.35 3049.39,1450.94 3049.39,1600.95 ; 3050.66,100.95 699.39,100.95 699.39,250.95 3050.66,250.95 ; 3050.66,400.95 699.39,400.95 699.39,550.95 3050.66,550.95 ; 3050.66,700.95 699.39,700.95 699.39,850.95 3050.66,850.95 ; 3050.66,1000.95 699.39,1000.95 699.39,1150.95 3050.66,1150.95 ; 3050.66,1300.95 699.39,1300.95 699.39,1450.95 ; 3050.66,1600.95 699.39,1600.95 699.39,1450.95 ; 699.39,1450.95 3050.66,1450.95 ; 699.39,1450.95 1249.39,1450.95 ; 1249.39,1450.95 1249.39,1600.95 1749.39,1600.95 1749.39,1450.95 ; 1749.39,1450.95 2149.39,1450.95 ; 1749.39,1450.95 2149.39,1450.95 ; 2149.39,1450.95 2149.39,1600.95 2699.39,1600.95 2699.39,1450.95 ; 2699.39,1450.95 3050.66,1450.95 ; 2699.39,1450.95 3050.66,1450.95 ; 699.39,-798.23 3050.66,-798.23 699.39,-798.23 ; 699.39,-199.05 3050.66,-199.05 699.39,-199.05
  text "Type" at 859.39,1512.22 h60
  text "Material" at 1389.39,1512.22 h60
  text "Weight" at 1869.39,1512.22 h60
  text "Dk" at 2849.39,1512.22 h60
  text "Thickness" at 2289.39,1510.95 h60
  text "Top Overlay" at 766.11,1350.94 h60
  text "0.01 mm" at 2290,1203.98 h60
  text "3.5" at 2826,1201.98 h60
  text "Top Solder" at 766.11,1200.34 h60
  text "0.0175 mm" at 2273,1095 h60
  text "0.5 oz" at 1881,1068 h60
  text "Top Layer" at 766.11,1050.95 h60
  text "(Plating to 1 oz)" at 2236,1024 h60
  text "2116 RC58%" at 1335,912 h60
  text "0.1195 mm" at 2302,907.98 h60
  text "4.45" at 2824,907.98 h60
  text "Dielectric 1" at 784,904.6 h60
  text "Second Layer" at 777,759.58 h60
  text "1 oz" at 1875,753 h60
  text "0.035 mm" at 2279,747.98 h60
  text "Core" at 1423.37,611.59 h60
  text "Core 1" at 784,611 h60
  text "0.43 mm" at 2290,604 h60
  text "4.6" at 2831,600.98 h60
  text "1 oz" at 1873,454 h60
  text "0.035 mm" at 2296,451.98 h60
  text "Third Layer" at 766.11,450.94 h60
  text "Dielectric 2" at 767,307.6 h60
  text "4.74" at 2799.63,304.8 h60
  text "7628 RC 46%" at 1347,303 h60
  text "0.175 mm" at 2281,302 h60
  text "1 oz" at 1863.59,161.86 h60
  text "0.035 mm" at 2286.59,159.85 h60
  text "Fourth Layer" at 766.11,150.94 h60
  text "0.43 mm" at 2314,24 h60
  text "Core 2" at 790.11,9.3 h60
  text "Core" at 1428,5 h60
  text "4.6" at 2838,-1.02 h60
  text "Fifth Layer" at 787.73,-141.57 h60
  text "1 oz" at 1877.59,-153.14 h60
  text "0.035 mm" at 2300.59,-155.15 h60
  text "Dielectric 3" at 790.11,-297.66 h60
  text "0.1195 mm" at 2292,-299.02 h60
  text "2116 RC58%" at 1348,-302 h60
  text "4.45" at 2807,-303.02 h60
  text "0.0175 mm" at 2291,-407 h60
  text "0.5 oz" at 1879,-441 h60
  text "Sixth Layer" at 785.73,-441.57 h60
  text "(Plating to 1 oz)" at 2213,-468 h60
  text "Bottom Solder" at 760,-582 h60
  text "3.5" at 2822,-585 h60
  text "0.01 mm" at 2327,-607 h60
  text "Bottom Overlay" at 762,-733 h60
  text "Standard 6 layers stackup:" at 719,-904 h60
  text "Thickness 1.6 mm" at 775,-971.96 h60
  text "Finished Outer Copper: 1 oz" at 783,-1031 h60
  text "Inner Copper: 1 oz" at 784,-1088 h60
  text "Inner layer residual copper ratio: 70%" at 777,-1152.36 h60

## Text inside footprints (layer, text, board x,y; h text height)
J1: Top Assembly "PCB EDGE" at 206.69,17.52 h40